# Altium PCB suns_wifi_egse.PcbDoc
Units mil, origin at the board's own origin, x right, y up, seen from the top; angles counter-clockwise.
Board outline 1950 x 1830 mil, 2 copper layers (Top Layer, Bottom Layer), stack 12.8 mil thick; 30 components, 21 nets, 86 pads, 13 vias.
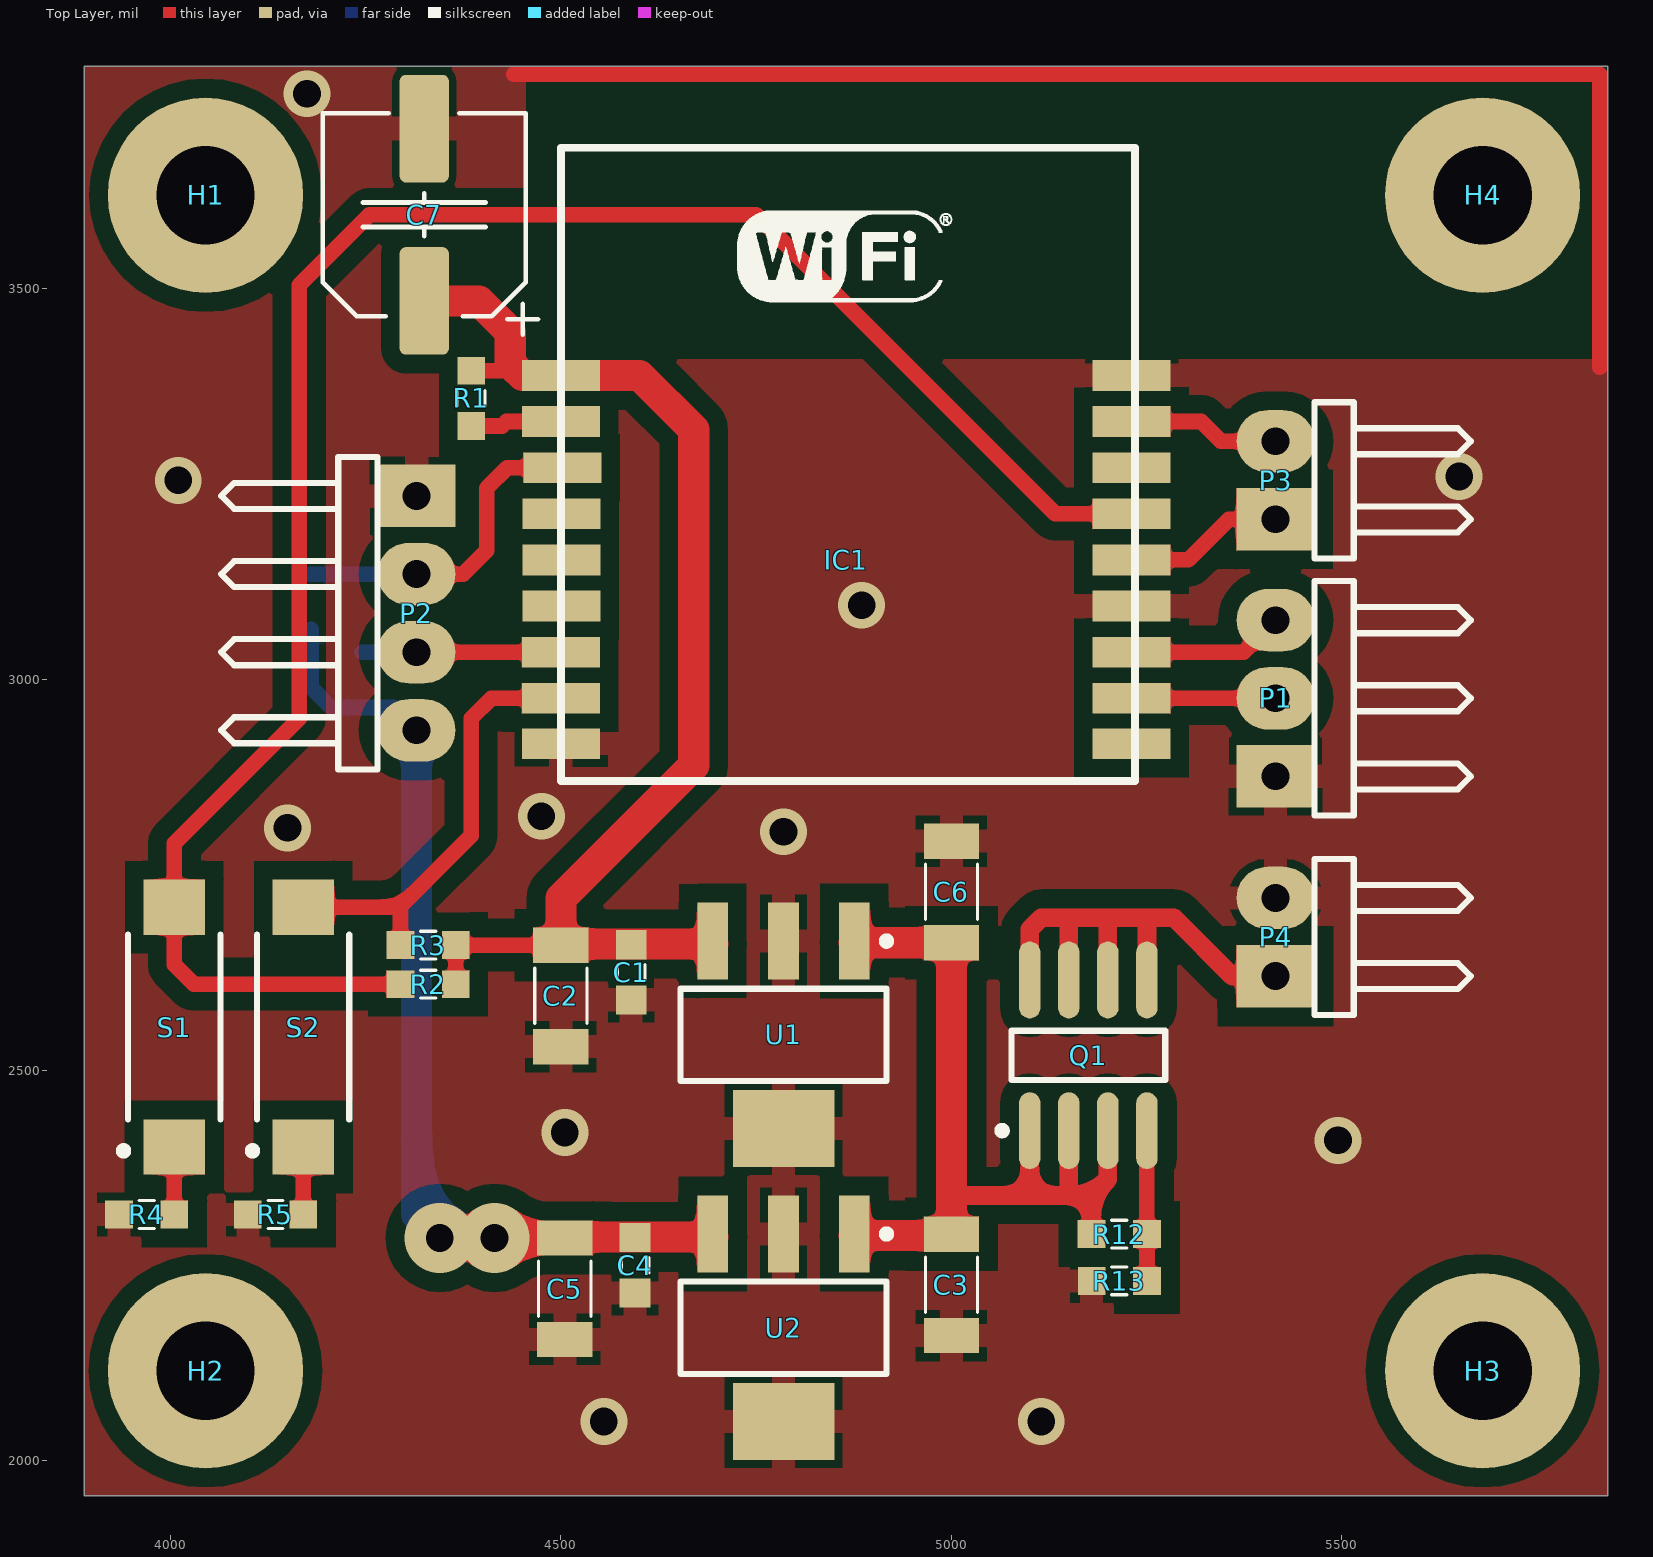
[diagram p0: Top Layer view]
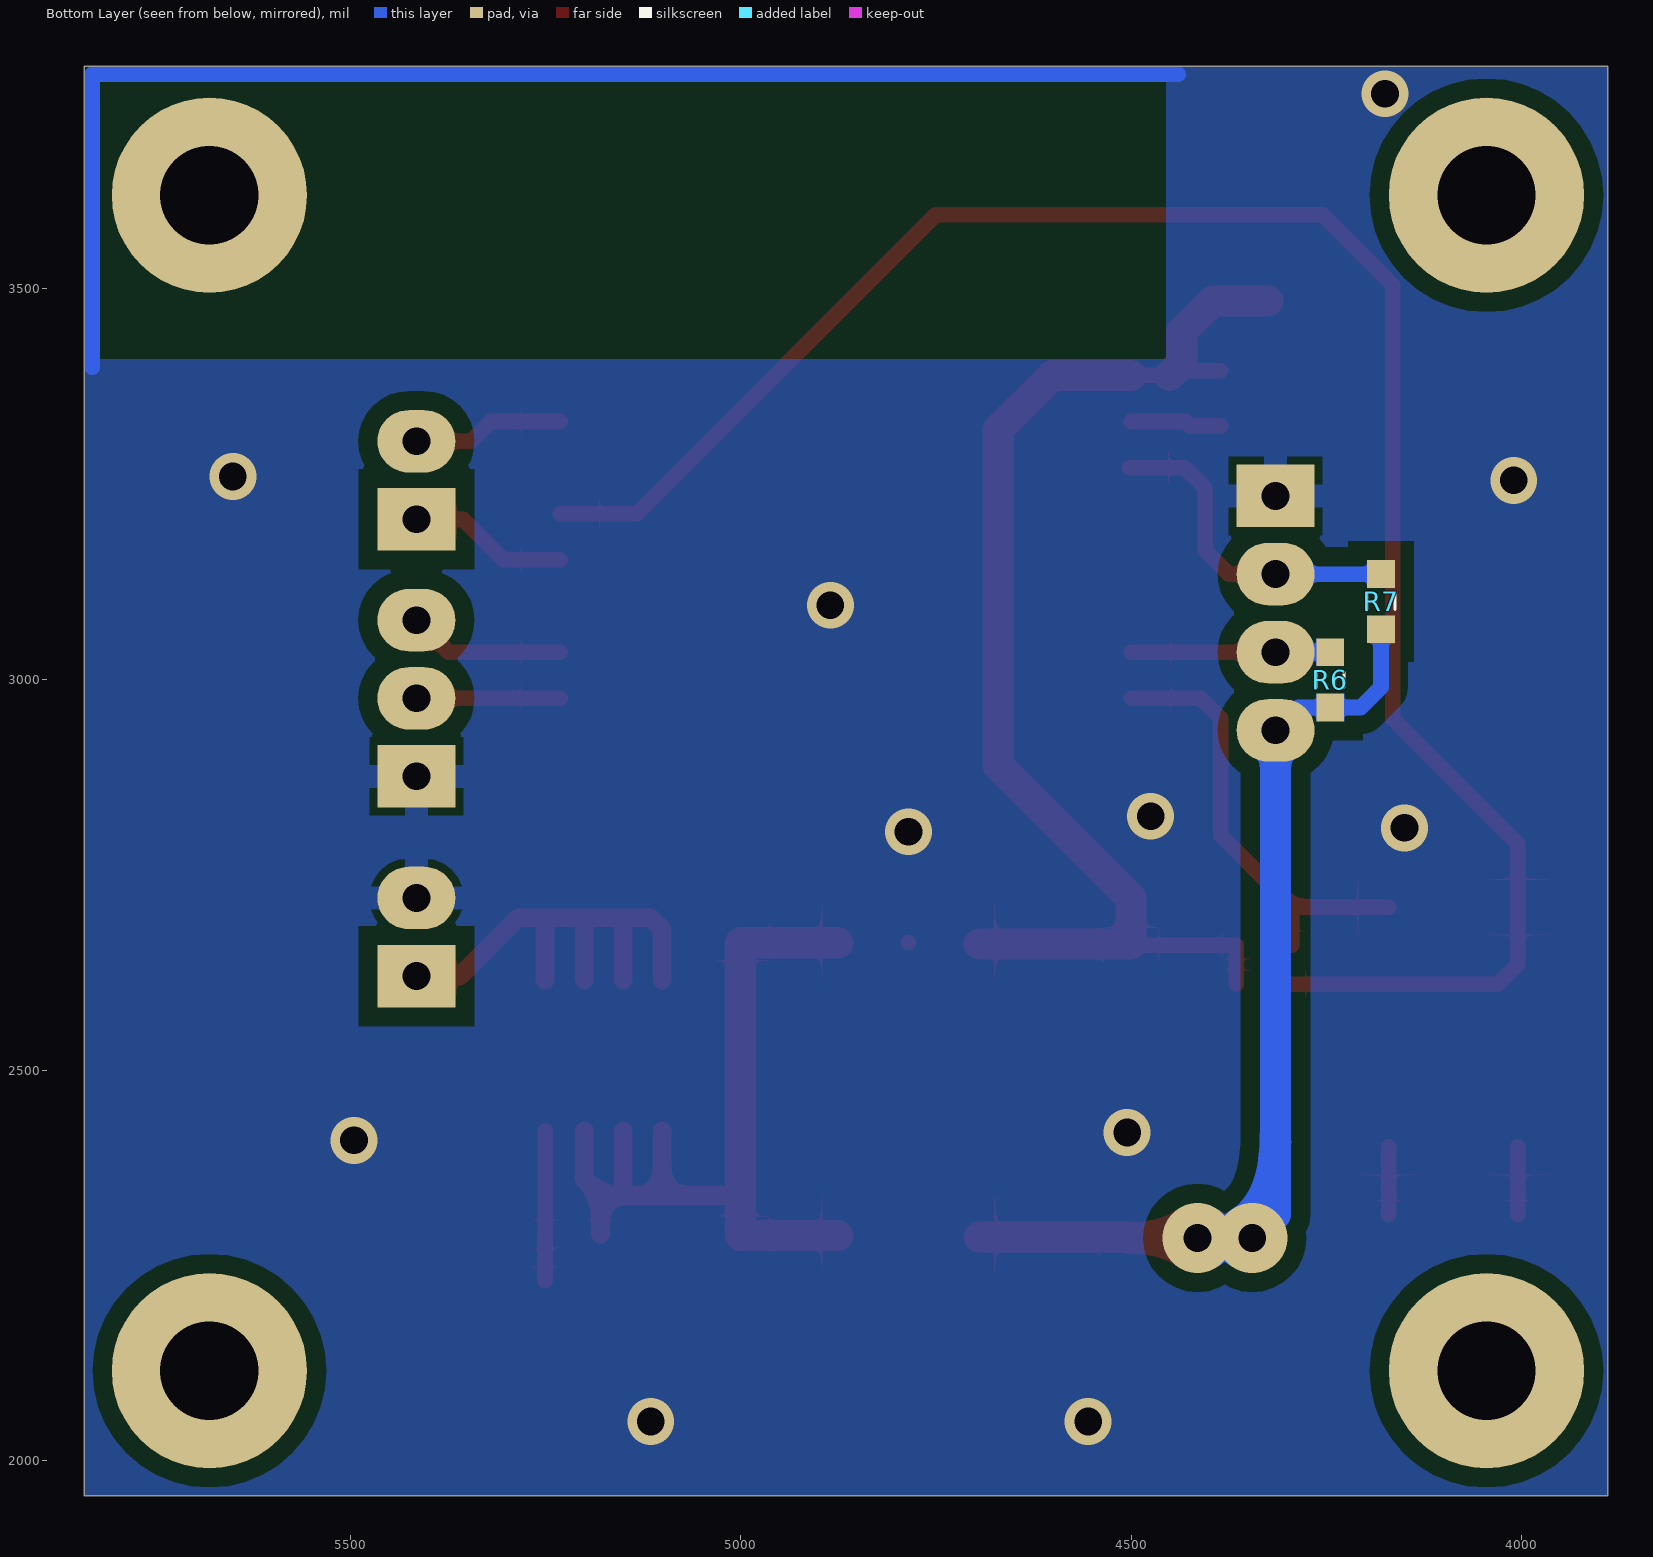
[diagram p1: Bottom Layer view, seen from below]
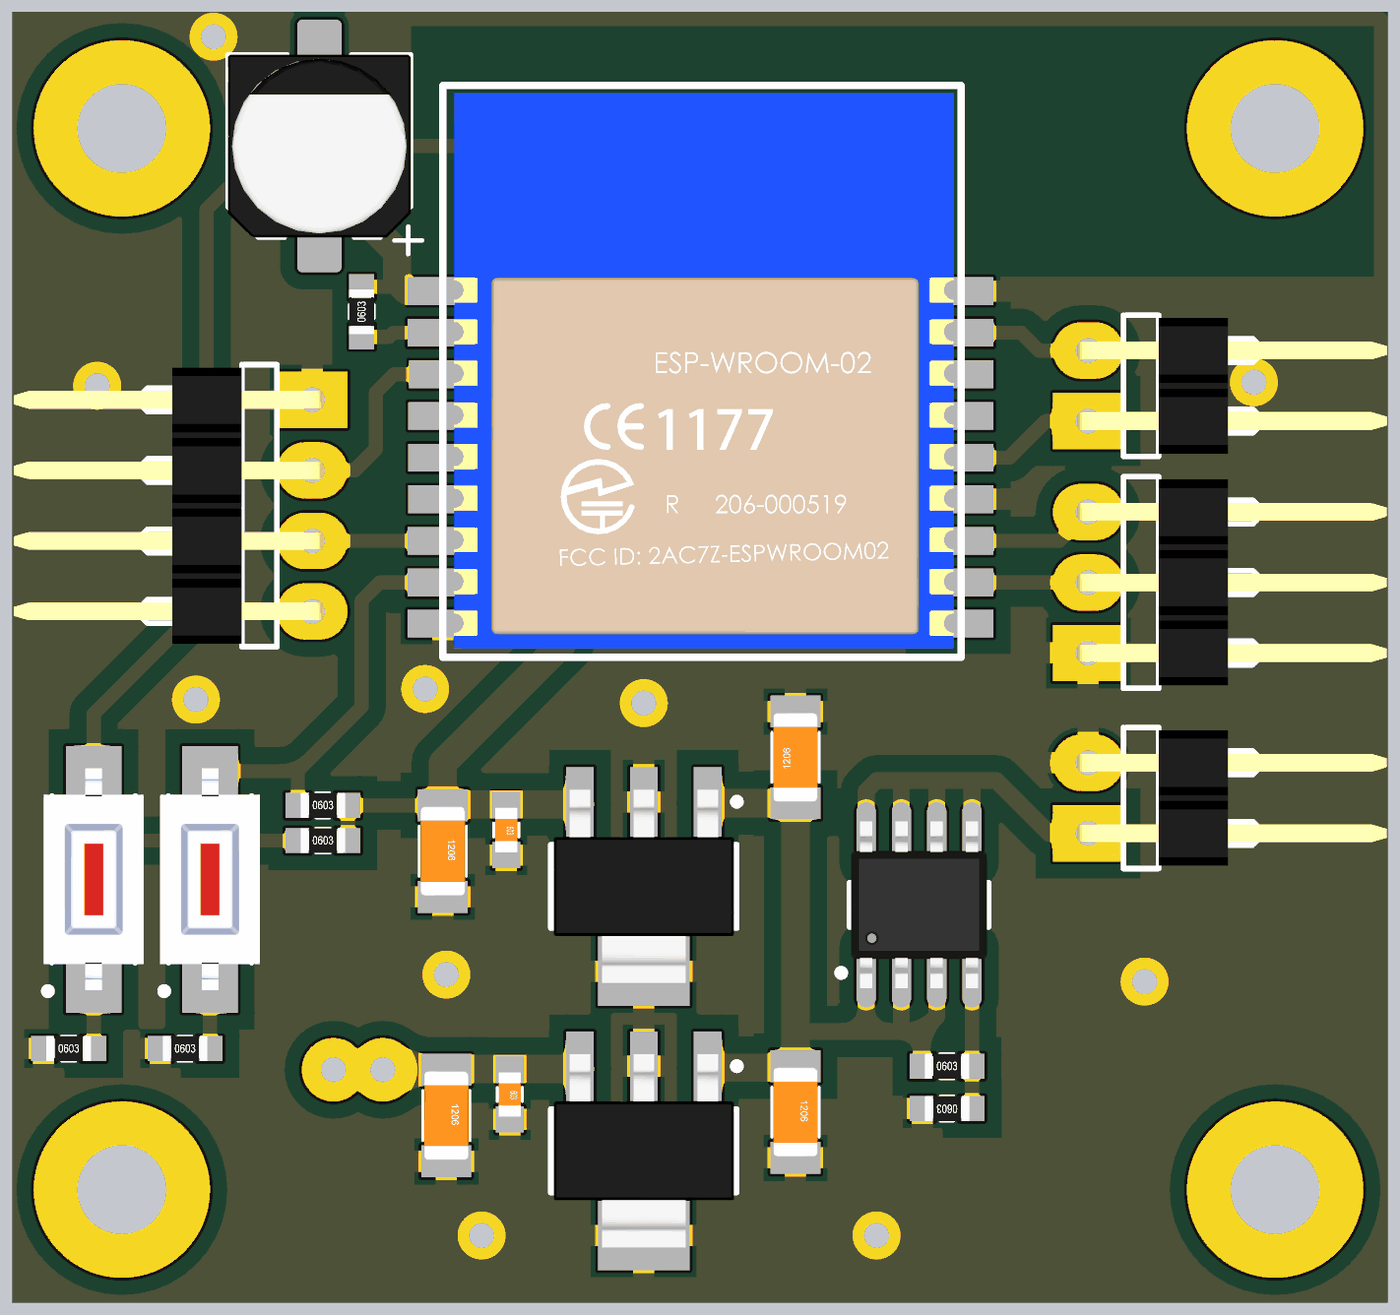
[diagram p2: 3D render of the assembled board from above, using the file's embedded part models]

## Layer stack, top to bottom
Top Layer: signal copper 1.4
Dielectric 1: core 10, FR-4, Dk 4.2
Bottom Layer: signal copper 1.4

## Board outline
3890,1955 5840,1955 5840,3785 3890,3785

## Design rules (kind name [scope] priority, off if disabled: settings)
Clearance Clearance_1 [All vs InPolygon] p1: gap=24
Clearance [All] p2: gap=10
PlaneConnect PlaneConnect_1 [IsVia] p1: planeconnectstyle=Direct reliefexpansion=20 reliefentries=4 reliefconductorwidth=10 reliefairgap=10
PlaneConnect [All] p2: planeconnectstyle=Relief reliefexpansion=20 reliefentries=4 reliefconductorwidth=10 reliefairgap=10
PolygonConnect PolygonConnect_1 [All vs IsVia] p1: connectstyle=Direct reliefconductorwidth=10 reliefentries=4 polygonreliefangle="90 Angle" airgapwidth=10
PolygonConnect [All] p2: connectstyle=Relief reliefconductorwidth=30 reliefentries=4 polygonreliefangle="90 Angle" airgapwidth=10
RoutingVias [All] p1: holewidth=28 width=50 viastyle="Through Hole" minholewidth=28 minwidth=50 maxholewidth=28 maxwidth=50
SolderMaskExpansion [All] p1: expansion=4
Width [All] p1: maxlimit=100 minlimit=16 preferedwidth=20 minimp=50.000000 maximp=50.000000 favimp=50.000000
29 further rules are at their usual default settings.

## Classes and differential pairs
component class EPS: C1 C2 C3 C4 C5 C6 Q1 R12 R13 U1 U2
component class ESP8266: C7 IC1 R1 R2 R3 R4 R5 R6 R7 S1 S2
component class suns_wifi_egse_top_connectors: H1 H2 H3 H4 P1 P2 P3 P4

## Components (designator, comment, footprint, x,y, rotation, side; value= is the part's Value field where it differs from the comment)
C1 "100n/50V" SMD_Capacitor_0603 4590,2625 r270 top
C2 "10u/16V" SMD_Capacitor_1206 4500,2595 r270 top
C3 "4.7u/16V" SMD_Capacitor_1206 5000,2225 r270 top
C4 "100n/50V" SMD_Capacitor_0603 4595,2250 r270 top
C5 "10u/16V" SMD_Capacitor_1206 4505,2220 r270 top
C6 "4.7u/16V" SMD_Capacitor_1206 5000,2728.07 r90 top
C7 "100u" CAP_ELEC_6.3x4.2 4325,3595 r270 top
H1 "Mounting Hole" PC-104_PcbMntHole_M3 4045,3620 r0 top
H2 "Mounting Hole" PC-104_PcbMntHole_M3 4045,2115 r0 top
H3 "Mounting Hole" PC-104_PcbMntHole_M3 5680,2115 r0 top
H4 "Mounting Hole" PC-104_PcbMntHole_M3 5680,3620 r0 top
IC1 "ESP8266 ESP-wroom-02" "ESP8266 ESP-wroom-02" 4500,2916.89 r0 top
P1 "Header 3" "HEADER1X3H Male" 5415,2875.94 r90 top
P2 "Header 4" "HEADER 1X4H Male" 4315,3235 r270 top
P3 "Header 2" "HEADER 1X2H Male" 5415,3205 r90 top
P4 "Header 2" "HEADER 1X2H Male" 5414.98,2620.31 r90 top
Q1 "Si4403BDY" SOIC-8_M 5175.28,2518.86 r90 top
R1 "10k/1%" SMD_Resistor_0603 4385,3360 r90 top
R2 "1k/1%" SMD_Resistor_0603 4330,2610 r0 top
R3 "1k/1%" SMD_Resistor_0603 4330,2660 r0 top
R4 "100R/1%" SMD_Resistor_0603 3969.57,2315 r0 top
R5 "100R/1%" SMD_Resistor_0603 4134.57,2315 r0 top
R6 "4.7k/1%" SMD_Resistor_0603 4245,2999.57 r90 bottom
R7 "4.7k/1%" SMD_Resistor_0603 4180,3099.57 r90 bottom
R12 "3.3k/1%" SMD_Resistor_0603 5214.84,2290 r0 top
R13 "1k/1%" SMD_Resistor_0603 5215,2230 r180 top
S1 "Tact Switch" "Tact Switch 3x6" 4005,2555 r90 top
S2 "Tact Switch" "Tact Switch 3x6" 4170,2555 r90 top
U1 "MCP1826S-3302E/DB" SOT-223-DB3_M 4785,2545 r270 top
U2 "MCP1826S-3302E/DB" SOT-223-DB3_M 4785,2170 r270 top

## Footprints (in the part's own frame and the unit in brackets; to place one, negate y for a bottom-side part, rotate by r counter-clockwise, add the part's x,y. Pads: shape width x height; smd on the part's side, far side on the other; paste and mask are expansions set on the pad)
CAP_ELEC_6.3x4.2 [mm] "Capacitor, polarized, aluminum can; 6.3x4.2mm DxH"
  round 0.508 on Mech15: 0(0,0)
  rrect25% 3.5x1.6 smd: 1(2.8,0) 2(-2.8,0)
  silkscreen extent -3.3,-3.3 3.9,3.7, body extent -3.3,-3.3 3.3,3.3, height 4.23
"ESP8266 ESP-wroom-02" [mm] "ESP8266 ESP-wroom-02"
  rect 2.54x1 smd: 1(0,12) 2(0,10.5) 3(0.051,9) 4(0.025,7.5) 5(0.025,6) 6(0.025,4.5) 7(0,3) 8(0,1.5) 9(0,0.025) 10(18.56,0.025) 11(18.56,1.5) 12(18.56,3) 13(18.56,4.5) 14(18.56,6) 15(18.56,7.5) 16(18.56,9) 17(18.56,10.5) 18(18.56,12)
  silkscreen extent 0,-1.19 18.67,19.41, body extent 0.4,-0.86 18.4,19.14, height 3
"HEADER1X3H Male" [mil] "Connector; Header; 3 Position; Right Angle; Male"
  rect 80x100 hole 35.43: 1(0,0)
  oval 80x100 hole 35.43: 2(100,0) 3(200,0)
  silkscreen extent -50,-250 250,-50, body extent -46,-424 246,15, height 108
"HEADER 1X2H Male" [mil] "Connector; Header; 2 Position; Right Angle; Male"
  rect 80x100 hole 35.43: 1(0,0)
  oval 80x100 hole 35.43: 2(100,0)
  silkscreen extent -50,-250 150,-50, body extent -46,-424 146,15, height 108
"HEADER 1X4H Male" [mil] "Connector; Header; 4 Position; Right Angle; Male"
  rect 80x100 hole 35.43: 1(0,0)
  oval 80x100 hole 35.43: 2(100,0) 3(200,0) 4(300,0)
  silkscreen extent -50,-250 350,-50, body extent -46,-424 346,15, height 108
PC-104_PcbMntHole_M3 [mm] "PCB Mounting Hole for PC-104 standard. Based on Pumpkin's Kit."
  round 6.35 hole 3.2: 1(0,0)
SMD_Capacitor_0603 [mm] "SMD Capacitor, Inch 0603, Metric 1608."
  rect 0.95x1 smd: 1(-0.9,0) 2(0.9,0)
  silkscreen extent -0.25,-0.45 0.25,0.45, body extent -0.8,-0.4 0.8,0.4, height 0.3
SMD_Capacitor_1206 [mm] "SMD Capacitor, Inch 1206, Metric 3216."
  rect 1.15x1.8 smd: 1(-1.65,0) 2(1.65,0)
  silkscreen extent -0.9,-0.85 0.9,0.85, body extent -1.6,-0.8 1.6,0.8, height 1
SMD_Resistor_0603 [mm] "SMD Resistor, Inch 0603, Metric 1608."
  rect 0.9x0.9 smd: 1(-0.9,0) 2(0.9,0)
  silkscreen extent -0.25,-0.45 0.25,0.45, body extent -0.8,-0.45 0.8,0.45, height 0.5
SOIC-8_M [mm] "SOIC, 8-Leads, Body 4.9x3.9mm, Pitch 1.27mm, IPC Low Density"
  oval 2.5x0.7 smd: 1(-2.45,1.905) 2(-2.45,0.635) 3(-2.45,-0.635) 4(-2.45,-1.905) 5(2.45,-1.905) 6(2.45,-0.635) 7(2.45,0.635) 8(2.45,1.905)
  silkscreen extent -2.57,-2.5 0.8,2.93, body extent -3,-2.45 3,2.45, height 1.7
SOT-223-DB3_M [mm] "SOT223, 4-Leads, Body 6.5x3.5mm, Pitch 2.3mm, Lead Span 7mm, IPC Low Density"
  rect 2.5x1 smd: 1(-3.05,2.3) 2(-3.05,0) 3(-3.05,-2.3)
  rect 2.5x3.3 smd: 4(3.05,0)
  silkscreen extent -3.17,-3.35 1.5,3.48, body extent -3.48,-3.25 3.48,3.25, height 1.7
"Tact Switch 3x6" [mm] "SODFL, 2-Leads, Body 3,00x8,00mm, IPC Medium Density"
  rect 1.8x2 smd: 1(-3.9,0) 2(3.9,0)
  silkscreen extent -4.15,-1.5 3,1.77, body extent -4,-1.8 4,1.8, height 2.6

## Part data
C1 C4: library part Cer_C0603T104K5RALTU, "Ceramic Cap Kemet COTS 100n/50V X7R 0603"
C2 C3 C5 C6: library part Cer_C1206T106K4RACTU, "Ceramic Cap Kemet COTS 10u/16V X7R 1206"
C7: library part "Cap Pol", "Polarized Capacitor"
H1 H2 H3 H4: library part MntHole, "PCB Mounting Hole"
P1: "Header, 3-Pin"
P2: "Header, 4-Pin"
P3 P4: "Header, 2-Pin"
Q1: "P-Channel 1.8 V (G-S) MOSFET"
R1 R2 R3 R4 R5 R12 R13: library part CRCW06031K00FKxxxx, "1k/1% Vishay CRCW 0603 Resistor. 100mW, 100ppm, 75V."
R6 R7: library part CRCW06034K70FKxxxx, "4.7k/1% Vishay CRCW 0603 Resistor. 100mW, 100ppm, 75V."
S1 S2: library part TactSwitch
U1 U2: "1000 mA, Low Voltage, Low Quiescent Current LDO Regulator, 3-Pin SOT-223, Extended Temperature"

## Via types
v1: diameter 60, hole 35.43, Top Layer to Bottom Layer, 11 vias
v2: diameter 90, hole 35.43, Top Layer to Bottom Layer, 2 vias

## Nets (pads, with @x,y where several pads share a name; then routed paths per layer and width w, separated by ;. In a path a pad name is that pad's centre, name@x,y a point inside that pad or via, vN(x,y) a via of type N, cw(c..) or ccw(c..) an arc to the next point about the centre after c; other vN are vias at no path point)
ESP_3V3: C1.1 C2.1 C7.1 IC1.1 R1.2 R2.2 R3.2 U1.3 | length 1613.6
  Top Layer w20: R2.2 R3.2 4498.74,2660 C2.1@4500,2661.26 ; R1.2 4430,3395.43 4436.1,3389.33 4450.67,3389.33 IC1.1
  Top Layer w40: C7.1 4395.24,3484.76 4435,3445 4435,3405 IC1.1@4450.67,3389.33 ; IC1.1 4600.67,3389.33 4670,3320 4670,2890 4500,2720 4500,2661.26 4590,2661.26 U1.3@4694.45,2661.26
GND: C1.2 C2.2 C3.2 C4.2 C5.2 C6.2 C7.2 IC1.9 IC1.13 IC1.18 P1.1 P2.1 P4.2 R4.1 R5.1 R13.2 U1.2 U1.4 U2.2 U2.4 | length 3530.1
  Top Layer w20: 4440,3775 5830,3775 5830,3400 ; U1.2@4785,2663.11 U1.2@4785.04,2663.15
  Bottom Layer w20: 4440,3775 5830,3775 5830,3400
  other v1: 4555,2050 5115,2050 5495,2410 4505,2420 4785,2805 4150,2810 4475,2825 4885,3095 4010,3255 5650,3260 4175,3750
IO4: IC1.10
IO5: IC1.14 P3.1 | length 205.1
  Top Layer w20: IC1.14 5303.11,3153.11 5355,3205 P3.1@5414.29,3205
IO12: IC1.4
IO13: IC1.5
IO15: IC1.6
IO16: IC1.17 P3.2 | length 194.1
  Top Layer w20: IC1.17 5319.72,3330.28 5345,3305 P3.2@5414.29,3305
NetC3_1: C3.1 C6.1 Q1.1 Q1.2 Q1.3 R12.1 U1.1 U2.1 | length 1101.8
  Top Layer w20: 5000,2420 5002.4,2422.4 ; 5150,2349.84 5150.28,2350.12
  Top Layer w24: 5000,2340 5000.59,2339.41 5100.28,2339.41 ; Q1.1 5100.28,2339.41 ; 5150.28,2350.12 Q1.2 ; R12.1 5179.41,2339.41 ; Q1.3 5200.28,2360.28 5179.41,2339.41 ; 5100.28,2339.41 5179.41,2339.41
  Top Layer w40: U2.1@4875.55,2288.11 C3.1@5000,2288.11 ; U1.1@4875.55,2663.11 C6.1 5000,2420 5000,2340 C3.1
NetIC1_2: IC1.2 R1.1 | length 117.4
  Top Layer w20: R1.1 4424.57,3324.57 4430.28,3330.28 IC1.2
NetIC1_8: IC1.8 R3.1 S2.2 | length 577.6
  Top Layer w20: S2.2 4293.54,2708.54 ; R3.1 4294.57,2707.52 4293.54,2708.54 ; IC1.8 4410.94,2975.94 4385,2950 4385,2800 4293.54,2708.54
NetIC1_11: IC1.11 P1.2 | length 184.3
  Top Layer w20: IC1.11 P1.2
NetIC1_12: IC1.12 P1.3 | length 201.3
  Top Layer w20: IC1.12 5374.06,3035 P1.3
NetIC1_15: IC1.15 R2.1 S1.2 | length 2497.8
  Top Layer w20: R2.1 4030,2610 4005,2635 S1.2 4005,2790 4165,2950 4165,3505 4255,3595 4750,3595 5132.83,3212.17 IC1.15
NetQ1_4: Q1.4 R12.2 R13.1 | length 192.6
  Top Layer w20: R12.2@5250.28,2289.84 Q1.4 ; R12.2 5250.43,2289.84 R13.1
NetR4_2: R4.2 S1.1 | length 86.5
  Top Layer w20: R4.2 S1.1
NetR5_2: R5.2 S2.1 | length 86.5
  Top Layer w20: R5.2 S2.1
SCL: IC1.3 P2.2 R7.2 | length 425.3
  Top Layer w20: P2.2 4375,3135 4405,3165 4405,3245 4431.22,3271.22 IC1.3
  Bottom Layer w20: R7.2 P2.2
SDA: IC1.7 P2.3 R6.2 | length 255
  Top Layer w20: P2.3 IC1.7
  Bottom Layer w20: R6.2 P2.3
SUNS_3V3: C4.1 C5.1 P2.4 R6.1 R7.1 U2.3 | length 1328.8
  Top Layer w40: v2(4345,2285) C5.1 ; C5.1@4500,2286.26 U2.3@4694.45,2286.26
  Bottom Layer w20: R7.1 4180,2990 4205.87,2964.13 R6.1 4285.87,2964.13 P2.4
  Bottom Layer w40: P2.4 4315,2315 v2(4345,2285) v2@4425,2285
  other v2: 4415,2285
VIN: P4.1 Q1.5 Q1.6 Q1.7 Q1.8 | length 655.3
  Top Layer w24: Q1.8 5100.28,2680.28 5115,2695 5250,2695 ; Q1.7 5150.28,2694.72 ; Q1.6 5200.28,2694.72 ; Q1.5 5250.28,2694.72 5250,2695 ; P4.1 5359.69,2620.31 5285,2695 5250,2695
pads on no net: C7.0 H1.1 H2.1 H3.1 H4.1 IC1.16

## Polygon pours and split planes (outlines as drawn)
GND on Top Layer "GND_L01_P000" (solid, remove dead copper, pour order 0): 3890,3785 4865,3785 5840,3785 5840,1955 3890,1955
GND on Bottom Layer "GND_L02_P002" (solid, remove dead copper, pour order 2): 3890,3785 5840,3785 5840,1955 3890,1955

## Other copper
Top Layer:
  pour cut-out: 4455,3790 4455,3410 5840,3410 5840,3790
Bottom Layer:
  pour cut-out: 4455,3790 4455,3410 5840,3410 5840,3790

## Silkscreen, mask and mechanical layers (free items; w line width, h text height)
Mechanical 1:
  the board outline again, w8